# Altium PCB PCB4.PcbDoc (part 4 of 4)
Units mm, origin at the board's own origin, x right, y up, seen from the top; angles counter-clockwise.
Board outline 297 x 150 mm, 2 copper layers (Top Layer, Bottom Layer); 237 components, 147 nets, 681 pads, 111 vias.
Unrouted connection lines stored in the file: 7.
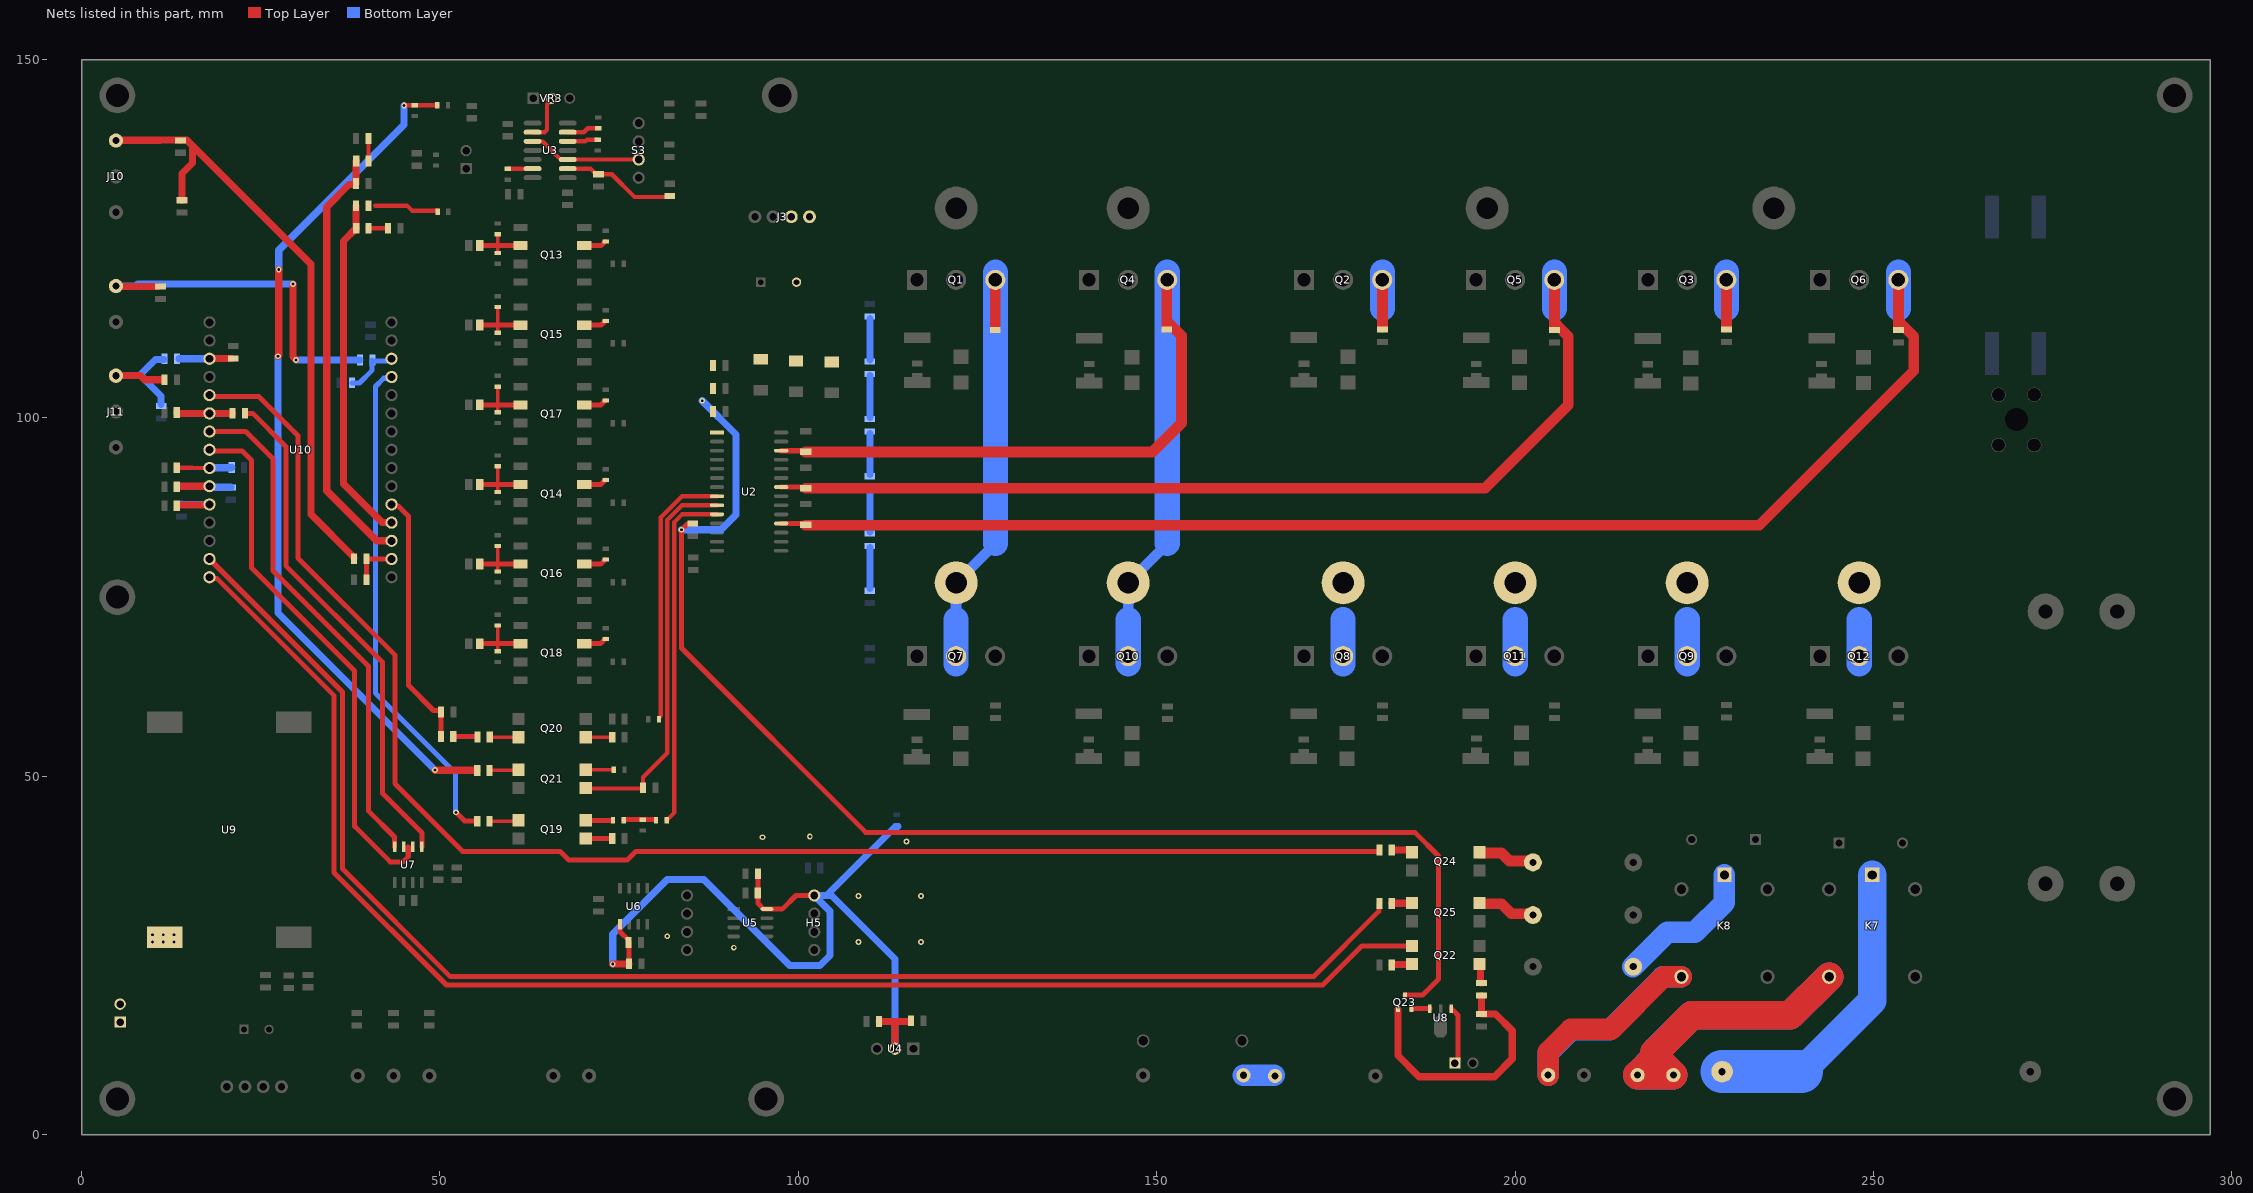
[diagram p3: the nets of this part, all layers, seen from the top]

## Via types
v1: diameter 0.8, hole 0.4, Top Layer to Bottom Layer, 111 vias

## Nets (pads, with @x,y where several pads share a name; then routed paths per layer and width w, separated by ;. In a path a pad name is that pad's centre, name@x,y a point inside that pad or via, vN(x,y) a via of type N, cw(c..) or ccw(c..) an arc to the next point about the centre after c; other vN are vias at no path point) (continued)
NetJ6_1: J6.1 U8.1 | length 8.2
  Top Layer w0.7: U8.1@191.1,17.6 191.2,17.5 191.2,17.35 191.35,17.35 192,16.7 192,10.4 J6.1@191.6,10
NetJ7_1: J7.1 J7.2 K7.3 | length 83.4
  Top Layer w4: 219.449,10.301 219.449,10.699 ; K7.3@243.8,22.05 238.4,16.65 224.627,16.65 219.449,11.472 219.449,10.951 ; 219.449,10.699 219.449,10.951 ; 219.449,10.699 J7.1@217.075,8.325 J7.2@222.075,8.325 219.449,10.951
  Bottom Layer w4: K7.3@243.8,22.05 238.4,16.65 224.625,16.65 219.575,11.6 219.575,10.825 ; 219.575,10.825 J7.1@217.075,8.325 J7.2@222.075,8.325 219.575,10.825
NetJ8_1: J8.1 K8.3 | length 52.3
  Top Layer w3: J8.1@204.6,8.325 204.6,11.55 207.788,14.738 213.388,14.738 220.7,22.05 K8.3@223.2,22.05
  Bottom Layer w3: J8.1@204.6,8.325 204.6,11.425 207.825,14.65 213.225,14.65 220.625,22.05 K8.3@223.2,22.05
NetJ10_1: J10.1 R105.1 R107.2 R113.2 | length 86.2
  Top Layer w1: J10.1@4.8,138.7 4.85,138.75 10.927,138.75 10.942,138.765 13.768,138.765 R107.2@13.8,138.732 13.816,138.732 13.848,138.765 14.685,138.765 15.468,137.982 ; R105.1@14,130.375 14,134.107 15.468,135.575 15.468,137.982 ; R113.2@38.018,80.375 38.018,80.55 32,86.568 32,121.45 15.468,137.982
NetJ11_1: J11.1 R106.1 R108.2 R114.2 | length 19.8
  Top Layer w1: J11.1@4.8,105.9 4.825,105.925 8.225,105.925 8.825,105.325 R108.2@11.25,105.325
  Bottom Layer w1: J11.1@4.8,105.9 4.825,105.925 8.075,105.925 ; R106.1@11.099,101.9 11.099,103.076 8.25,105.925 8.075,105.925 ; R114.2@11.518,108.175 11.518,108.145 10.295,108.145 8.075,105.925
NetJ13_1: J13.1 R112.2 R115.2 | length 50.5
  Top Layer w1: J13.1@4.8,118.4 4.859,118.341 R112.2@10.75,118.341 ; v1(29.5,118.7) 29.5,108.5 v1(29.9,108.1)
  Bottom Layer w1: J13.1@4.8,118.4 7.5,118.4 7.8,118.7 v1(29.5,118.7) ; v1(29.9,108.1) R115.2@38.843,108.1
NetJ14_1: J14.1 J14.2 U9.1
  other v1: 9.9,26.9 11.4,26.9 12.9,26.9 9.9,27.9 11.4,27.9 12.9,27.9
NetK7_1: K7.1 R96.1 | length 42.6
  Bottom Layer w4: 239.925,8.8 249.8,18.675 K7.1@249.8,36.25
  Bottom Layer w6: R96.1@228.875,8.8 239.925,8.8
NetK8_1: K8.1 R99.2 | length 20.4
  Bottom Layer w3: R99.2@216.4,23.45 221.2,28.25 225.075,28.25 229.2,32.375 K8.1@229.2,36.25
NetQ13_2: Q13.2 R59.1 R62.2 R68.2 | length 8.3
  Top Layer w0.5: R68.2@58.05,123.007 58.05,124.062 R59.1@58.05,125.625
  Top Layer w0.7: R62.2@55.525,124.077 55.54,124.062 58.05,124.062 61.21,124.062 Q13.2@61.225,124.047
NetQ13_7: Q13.7 R65.1 | length 3.2
  Top Layer w0.7: Q13.7@70.125,124.047 72.495,124.047 73.075,124.627 R65.1@73.125,124.627
NetQ14_2: Q14.2 R60.1 R63.2 R69.2 | length 9.3
  Top Layer w0.5: R69.2@58.05,89.68 58.05,90.726 R60.1@58.05,93.26
  Top Layer w0.7: R63.2@55.525,90.732 55.531,90.726 58.05,90.726 61.219,90.726 Q14.2@61.225,90.72
NetQ14_7: Q14.7 R66.1 | length 3.3
  Top Layer w0.7: Q14.7@70.125,90.72 72.438,90.72 73.075,91.357 R66.1@73.125,91.357
NetQ15_2: Q15.2 R61.1 R64.2 R70.2 | length 9.3
  Top Layer w0.5: R70.2@58.05,111.898 58.05,112.95 R61.1@58.05,115.478
  Top Layer w0.7: R64.2@55.525,112.962 55.537,112.95 58.05,112.95 61.213,112.95 Q15.2@61.225,112.938
NetQ15_7: Q15.7 R67.1 | length 3.2
  Top Layer w0.7: Q15.7@70.125,112.938 72.476,112.938 73.075,113.537 R67.1@73.125,113.537
NetQ16_2: Q16.2 R71.1 R74.2 R80.2 | length 9.3
  Top Layer w0.5: R80.2@58.05,78.571 58.05,79.614 R71.1@58.05,82.151
  Top Layer w0.7: R74.2@55.525,79.617 55.528,79.614 58.05,79.614 61.222,79.614 Q16.2@61.225,79.611
NetQ16_7: Q16.7 R77.1 | length 3.3
  Top Layer w0.7: Q16.7@70.125,79.611 72.419,79.611 73.075,80.267 R77.1@73.125,80.267
NetQ17_2: Q17.2 R72.1 R75.2 R81.2 | length 9.3
  Top Layer w0.5: R81.2@58.05,100.789 58.05,101.838 R72.1@58.05,104.369
  Top Layer w0.7: R75.2@55.525,101.847 55.534,101.838 58.05,101.838 61.216,101.838 Q17.2@61.225,101.829
NetQ17_7: Q17.7 R78.1 | length 3.3
  Top Layer w0.7: Q17.7@70.125,101.829 72.457,101.829 73.075,102.447 R78.1@73.125,102.447
NetQ18_2: Q18.2 R73.1 R76.2 R82.2 | length 9.3
  Top Layer w0.5: R82.2@58.05,67.462 58.05,68.502 R73.1@58.05,71.042
  Top Layer w0.7: R76.2@55.525,68.502 58.05,68.502 Q18.2@61.225,68.502
NetQ18_7: Q18.7 R79.1 | length 3.3
  Top Layer w0.7: Q18.7@70.125,68.502 72.4,68.502 73.075,69.177 R79.1@73.125,69.177
NetQ19_1: Q19.1 R85.2 | length 4.1
  Top Layer w0.5: R85.2@56.932,43.725 60.815,43.725 Q19.1@60.96,43.87
NetQ19_3: Q19.3 R89.2 | length 3.7
  Top Layer w0.7: Q19.3@70.34,41.33 R89.2@74.034,41.33
NetQ19_4: Q19.4 R87.1 | length 3.6
  Top Layer w0.7: Q19.4@70.34,43.87 R87.1@73.9,43.87
NetQ20_1: Q20.1 R84.1 | length 3.7
  Top Layer w0.5: Q20.1@70.34,55.455 R84.1@74.034,55.455
NetQ20_4: Q20.4 R86.1 | length 4
  Top Layer w0.5: R86.1@56.95,55.475 60.94,55.475 Q20.4@60.96,55.455
NetQ21_1: Q21.1 R90.2 | length 4.1
  Top Layer w0.5: R90.2@56.882,50.825 60.865,50.825 Q21.1@60.96,50.92
NetQ21_3: Q21.3 R92.2 U2.9 | length 54.6
  Top Layer w0.6: Q21.3@70.34,48.38 70.42,48.3 78.218,48.3 R92.2@78.318,48.4 78.318,49.868 81.713,53.262 81.713,85.76 83.772,87.82 U2.9@88.647,87.82
NetQ21_4: Q21.4 R91.1 | length 3.9
  Top Layer w0.5: Q21.4@70.34,50.92 74.23,50.92 R91.1@74.25,50.9
NetQ22_1: Q22.1 U10.30 | length 208.1
  Top Layer w0.7: U10.30@17.85,77.78 18.041,77.589 18.911,77.589 35.2,61.3 35.2,36.6 50.9,20.9 173.166,20.9 178.611,26.345 Q22.1@185.635,26.345
NetQ22_2: Q22.2 R94.2 | length 3
  Top Layer w1: R94.2@182.857,23.675 182.922,23.74 185.695,23.74 Q22.2@185.76,23.805
NetQ22_3: Q22.3 R93.1 | length 2.8
  Top Layer w1: Q22.3@195.015,23.805 195.157,23.663 195.157,21.25 195.233,21.175 R93.1@195.3,21.175
NetQ23_1: Q23.1 R93.2 R95.2 | length 36.4
  Top Layer w1: Q23.1@183.647,17.509 183.647,11.053 186.6,8.1 197.1,8.1 199.6,10.6 199.6,14.5 197.243,16.857 R95.2@195.3,16.857 R93.2@195.3,19.443
NetQ23_2: Q23.2 U8.3 | length 2.6
  Top Layer w0.7: Q23.2@185.552,17.509 185.643,17.6 U8.3@188.1,17.6
NetQ24_1: Q24.1 R100.2 | length 1.9
  Top Layer w1: 183.3,39.725 183.315,39.71 185.186,39.71 Q24.1@185.201,39.696
NetQ24_4: Q24.4 R97.1 | length 8.1
  Top Layer w1.5: Q24.4@195.015,39.42 195.015,39.405 195.105,39.315 198.105,39.315 199.229,38.191 202.284,38.191 R97.1@202.475,38
NetQ25_1: Q25.1 R101.2 | length 2.9
  Top Layer w1: R101.2@182.782,32.275 182.805,32.297 185.613,32.297 Q25.1@185.635,32.32
NetQ25_4: Q25.4 R98.1 | length 8.2
  Top Layer w1.5: Q25.4@195.015,32.32 195.015,32.305 195.105,32.215 198.105,32.215 199.479,30.841 202.284,30.841 R98.1@202.475,30.65
NetR32_1: R32.1 R83.1 R87.2 | length 4.2
  Top Layer w0.7: R87.2@75.641,43.87 75.641,43.9 75.691,43.95 R83.1@78.3,43.95 79.8,43.95
NetR32_2: R32.2 U2.10 | length 48.5
  Top Layer w0.6: R32.2@81.65,43.9 81.65,44.05 81.8,44.05 82.7,44.95 82.7,85.475 83.775,86.55 U2.10@88.647,86.55
NetR33_2: R33.2 U2.8 | length 37.3
  Top Layer w0.6: R33.2@80.55,58.05 80.55,58.2 80.8,58.45 80.8,86.133 83.757,89.09 U2.8@88.647,89.09
NetR35_1: R35.1 R37.2 U3.9 | length 15.9
  Top Layer w0.6: U3.9@67.825,134.785 70.99,134.785 71.775,134 R35.1@72.1,134 73.963,134 77.145,130.818 81.925,130.818 R37.2@82.05,130.943
NetR38_2: R38.2 R109.2 | length 9.2
  Top Layer w0.6: 40.953,129.625 45.4,129.625 46.1,128.925 49.675,128.925 R38.2@49.675,128.775
NetR39_2: R39.2 R41.2 R90.1 | length 119.6
  Top Layer w0.6: v1(45,143.6) 45.025,143.625 R39.2@49.625,143.625 ; v1(49.3,50.9) v1@49.337,50.863 ; R90.1@55.163,50.863 R90.1@55.2,50.825
  Top Layer w1: v1(27.411,108.613) 27.5,108.702 v1(27.5,120.7) ; v1@49.337,50.863 R90.1@55.163,50.863
  Bottom Layer w1: v1(27.411,108.613) 27.4,108.602 27.4,72.8 v1(49.3,50.9) ; v1(27.5,120.7) 27.5,123.4 45,140.9 v1(45,143.6)
NetR42_1: R42.1 U3.6 | length 3.5
  Top Layer w0.6: R42.1@59.45,134.75 59.6,134.75 59.635,134.785 U3.6@62.925,134.785
NetR43_1: R43.1 U3.13 | length 4.5
  Top Layer w0.6: U3.13@67.825,139.865 70.059,139.865 70.619,140.425 R43.1@72.075,140.425
NetR46_1: R46.1 U3.12 | length 4.3
  Top Layer w0.6: U3.12@67.825,138.595 70.27,138.595 70.5,138.825 R46.1@72.025,138.825
NetR47_2: R47.2 R49.2 | length 4.3
  Bottom Layer w3: R49.2@162.1,8.3 R47.2@166.4,8.3
NetR48_1: R48.1 R50.1 | length 5.7
  Bottom Layer w1: R50.1@109.975,108.125 R48.1@109.975,113.875
NetR50_2: R50.2 R51.2 | length 5.8
  Bottom Layer w1: R51.2@109.975,100.1 R50.2@109.975,105.9
NetR51_1: R51.1 R53.1 | length 5.7
  Bottom Layer w1: R53.1@109.975,92.125 R51.1@109.975,97.8
NetR53_2: R53.2 R54.1 | length 5.7
  Bottom Layer w1: R54.1@109.975,84.125 R53.2@109.975,89.875
NetR54_2: R54.2 R55.1 | length 5.7
  Bottom Layer w1: R55.1@109.975,76.225 R54.2@109.975,81.9
NetR85_1: R85.1 U10.12 | length 70.4
  Top Layer w0.7: v1(52.225,44.975) 52.233,44.975 53.42,43.788 55.125,43.788 55.188,43.725 R85.1@55.2,43.725
  Bottom Layer w0.7: U10.12@43.25,105.72 43.071,105.541 42.141,105.541 41,104.4 41,61.6 52.175,50.425 52.175,45.025 v1(52.225,44.975)
NetR86_2: R86.2 R123.2 | length 3.4
  Top Layer w0.7: R123.2@51.857,55.575 55.143,55.575 55.218,55.5 R86.2@55.218,55.475
NetR100_1: R100.1 U10.20 | length 211.3
  Top Layer w0.7: U10.20@17.85,103.18 18.041,102.989 24.736,102.989 30.2,97.525 30.2,80.45 43.7,66.95 43.7,49 53.175,39.525 66.775,39.525 68,38.3 76.1,38.3 77.325,39.525 180.975,39.525 181.05,39.6 R100.1@181.05,39.725
NetR101_1: R101.1 U10.29 | length 206.6
  Top Layer w0.7: U10.29@17.85,80.32 36.4,61.77 36.4,37.1 51.437,22.063 171.863,22.063 180.975,31.175 180.975,32.2 R101.1@181.05,32.275
NetR109_1: R109.1 R110.2 U10.4 | length 48.5
  Top Layer w1: R109.1@38.3,129.6 38.309,129.591 38.309,126.484 R110.2@38.318,126.475 36.55,124.707 36.55,90.825 41.951,85.424 43.226,85.424 U10.4@43.25,85.4
NetR110_1: R110.1 R111.2 | length 2.9
  Top Layer w0.6: R110.1@39.912,126.463 42.755,126.463 R111.2@42.768,126.45
NetR113_1: R113.1 R116.2 U10.2 | length 6.5
  Top Layer w0.7: R116.2@39.75,77.425 R113.1@39.75,80.375 39.777,80.347 43.222,80.347 U10.2@43.25,80.32
NetR114_1: R114.1 R117.2 U10.18 | length 7.4
  Top Layer w1: U10.18@17.85,108.26 17.87,108.28 20.937,108.28 R117.2@20.95,108.293
  Bottom Layer w1: R114.1@13.575,108.255 17.845,108.255 U10.18@17.85,108.26
NetR115_1: R115.1 R118.2 U10.13 | length 8.5
  Bottom Layer w0.7: R118.2@37.707,104.9 37.735,104.872 38.772,104.872 40.5,106.6 40.5,108.025 R115.1@40.575,108.1 ; R115.1@40.625,107.975 U10.13@42.694,107.975 ; U10.13@42.694,107.975 U10.13@42.979,108.26 ; U10.13@42.694,107.975 U10.13@42.979,108.26 ; U10.13@42.979,108.26 U10.13@43.25,108.26 U10.13@42.979,108.26
NetR119_1: R119.1 R126.2 U10.24 | length 7.6
  Top Layer w0.6: R126.2@13.407,93.05 15.417,93.05 15.457,93.01 17.84,93.01 U10.24@17.85,93.02
  Bottom Layer w1: U10.24@17.85,93.02 17.89,93.06 20.91,93.06 R119.1@20.95,93.1
NetR120_1: R120.1 R127.2 U10.26 | length 8.5
  Top Layer w1: R127.2@13.407,87.75 13.407,87.77 13.482,87.845 17.755,87.845 U10.26@17.85,87.94
  Bottom Layer w1: R120.1@13.925,87.975 13.96,87.94 U10.26@17.85,87.94
NetR121_1: R121.1 R125.2 U10.3 | length 60.1
  Top Layer w1: R121.1@38.3,132.676 38.175,132.551 37.326,132.551 34.2,129.425 34.2,89.85 41.19,82.86 U10.3@43.25,82.86 ; R121.1@38.3,132.725 38.309,132.734 38.309,135.841 R125.2@38.318,135.85
NetR122_1: R122.1 R130.2 U10.25 | length 7.5
  Top Layer w1: R130.2@13.432,90.4 13.497,90.465 17.527,90.465 17.542,90.48 U10.25@17.85,90.48
  Bottom Layer w1: U10.25@17.85,90.48 17.984,90.346 18.554,90.346 18.575,90.325 R122.1@20.825,90.325
NetR123_1: R123.1 R131.2 U10.5 | length 36.2
  Top Layer w0.7: U10.5@43.25,87.94 43.441,87.749 44.151,87.749 45.6,86.3 45.6,62.7 49.104,59.196 50.068,59.196 50.143,59.121 R131.2@50.143,58.975 50.134,58.966 50.134,55.584 R123.1@50.125,55.575
NetR124_1: R124.1 R129.2 U10.21 | length 7.9
  Top Layer w1: R129.2@13.282,100.775 13.357,100.7 13.357,100.64 U10.21@17.85,100.64 17.855,100.645 21.045,100.645 R124.1@21.05,100.65
NetR124_2: R124.2 U7.1 | length 71.3
  Top Layer w0.7: R124.2@22.782,100.65 23.875,100.65 28.5,96.025 28.5,79.4 41.975,65.925 41.975,47.625 47.48,42.12 U7.1@47.48,40.175
NetR125_1: R125.1 R128.2 | length 3.1
  Top Layer w0.6: R128.2@40.032,138.975 40.041,138.966 40.041,135.859 R125.1@40.05,135.85
NetS3_3: S3.3 U3.3 U3.10 | length 15.9
  Top Layer w0.6: U3.3@62.925,138.595 62.944,138.576 64.328,138.576 66.83,136.074 67.806,136.074 U3.10@67.825,136.055 S3.3@77.725,136.055
NetU3_2: U3.2 VR3.2 | length 6.8
  Top Layer w0.6: U3.2@62.925,139.865 64.574,139.865 64.925,140.216 64.925,143.774 65.56,144.409 VR3.2@65.56,144.6
NetU7_2: U7.2 U7.3 U10.23 | length 74.7
  Top Layer w0.7: U10.23@17.85,95.56 18.01,95.4 22.403,95.4 23.74,94.063 23.74,79.06 38.1,64.7 38.1,43.025 43.05,38.075 44.85,38.075 45.575,38.8 45.575,40.175
NetU7_4: U7.4 U10.22 | length 71.6
  Top Layer w0.7: U10.22@17.85,98.1 22.9,98.1 26.7,94.3 26.7,78.7 40,65.4 40,45.2 43.67,41.53 U7.4@43.67,40.175
PHASE_A: C3.2 HS3.1 Q1.3 Q4.3 Q7.2 Q10.2 R4.2 R10.2 U2.26 | length 204.7
  Top Layer w0.7: 153.25,99.1 153.46,99.31
  Top Layer w0.8: U2.26@97.603,95.44 100.47,95.44 100.65,95.26 C3.2@101,95.26
  Top Layer w1.5: C3.2@101,95.26 149.41,95.26 153.25,99.1 ; R4.2@127.478,112.675 Q1.3@127.478,119.272 ; 151.39,113.54 151.411,113.519 ; R10.2@151.411,112.7 151.411,113.519 ; Q4.3@151.411,119.224 151.411,113.519 ; 153.46,99.31 153.46,111.47 151.411,113.519
  Bottom Layer w1.5: 122.009,71.886 122.009,76.991 HS3.1@122.018,77 127.478,82.46 ; Q10.2@146,66.773 146.009,66.782 146.009,76.991 HS3.1@146.018,77 151.46,82.442
  Bottom Layer w3.5: Q7.2@122.009,65.7 122.009,71.886 ; 127.478,82.46 Q1.3@127.478,119.272 Q1.3@127.478,120.325 ; Q10.2@146.018,65.709 146.018,71.895 ; 151.46,82.46 Q4.3@151.46,119.272 Q4.3@151.46,120.325
PHASE_B: C4.2 HS4.1 Q2.3 Q5.3 Q8.2 Q11.2 R5.2 R11.2 U2.22 | length 162.2
  Top Layer w0.7: U2.22@97.603,90.36 100.39,90.36 100.575,90.175 100.925,90.175 C4.2@101.025,90.075
  Top Layer w1.5: C4.2@101.025,90.18 195.78,90.18 207.423,101.823 207.423,111.379 206.022,112.779 205.826,112.976 ; R5.2@181.478,112.65 Q2.3@181.478,119.248 ; 205.5,112.7 Q5.3@205.5,119.232
  Bottom Layer w3.5: Q8.2@176.009,65.7 176.009,71.886 ; 181.469,115.275 Q2.3@181.469,120.35 ; Q11.2@200.009,65.7 200.009,71.886 ; 205.469,115.275 Q5.3@205.469,120.35
PHASE_C: C6.2 HS5.1 Q3.3 Q6.3 Q9.2 Q12.2 R6.2 R12.2 U2.18 | length 210.1
  Top Layer w0.7: U2.18@97.603,85.28 100.42,85.28 100.65,85.05 C6.2@101,85.05 ; 233.7,85.05 234.05,85.05
  Top Layer w1.5: C6.2@101,85.05 233.7,85.05 ; R6.2@229.478,112.725 Q3.3@229.478,119.322 ; 234.05,85.05 255.6,106.6 255.6,111.379 253.702,113.277 ; 253.5,112.7 Q6.3@253.5,119.232
  Bottom Layer w3.5: Q9.2@224.009,65.7 224.009,71.886 ; 229.469,115.275 Q3.3@229.469,120.35 ; Q12.2@248.009,65.7 248.009,71.886 ; 253.469,115.275 Q6.3@253.469,120.35
VCC_15V: C11.2 C12.1 C13.2 C14.1 D13.2 D14.2 D15.2 J3.1 J3.2 Q23.3 R25.1 U2.1 | length 185.2
  Top Layer w0.7: R25.1@85.25,85.28 85.175,85.205 84.505,85.205 v1(83.7,84.4) 83.7,67.9 109.4,42.2 185.5,42.2 185.512,42.188 186.012,42.188 189.3,38.9 189.3,21.7 187.091,19.491 Q23.3@184.6,19.491
  Bottom Layer w1: v1(83.7,84.4) 89.2,84.4 91.3,86.5 91.3,97.7 v1(86.6,102.4)
VS_GND: C20.2 C21.2 C24.2 C25.2 C26.2 C27.2 H5.1 R88.2 U4.2 U5.8 U6.5 | length 123.5
  Top Layer w0.7: U6.5@75.12,29.375 75.1,29.355 75.1,28.368 76.318,27.15 C24.2@76.318,26.825 76.343,26.8 C26.2@76.343,23.875 ; C27.2@94.357,36.4 94.357,32.28 95.158,31.48 U5.8@95.618,31.48 97.75,31.48 99.66,33.39 H5.1@102.225,33.39
  Top Layer w1: v1(74.1,23.8) 76.293,23.8 76.343,23.85 C26.2@76.343,23.875 ; C21.2@111.257,15.8 113.463,15.8 ; U4.2@113.5,12 113.5,15.763 113.463,15.8 ; C20.2@115.668,15.8 113.463,15.8
  Bottom Layer w1: v1(74.1,23.8) 74.1,28 81.7,35.6 86.8,35.6 98.8,23.6 103,23.6 104.4,25 104.4,31.192 102.225,33.367 H5.1@102.225,33.39 103.94,33.39 ; U4.2@113.5,12 113.5,24.5 104.61,33.39 103.94,33.39 ; R88.2@113.9,43 113.55,43 103.94,33.39
  other v1: 91,26.1 108.4,26.9 117.1,26.9 81.7,27.7 108.4,33.3 117.1,33.3 115.1,40.9 95,41.5 101.6,41.6
pads on no net: K7.4 K8.4 Q13.1 Q13.4 Q14.1 Q14.4 Q15.1 Q15.4 Q16.1 Q16.4 Q17.1 Q17.4 Q18.1 Q18.4 U2.21 U2.25 U3.14 U10.1 U10.16 U10.19 U10.27 U10.28

## Polygon pours and split planes (outlines as drawn)
no net on Bottom Solder "Bottom Solder-No Net" (hatched 45Degree grid 2 track 0.5): 264.175,27.4 275.325,27.373 275.325,107.6 264.175,107.6 264.175,61.15 113.45,61.15 113.45,45.65 264.175,45.65
no net on Bottom Solder "Bottom Solder-No Net" (hatched 45Degree grid 2 track 0.5): 257.325,5.225 277.45,5.225 292.15,19.925 292.325,128.05 279.4,140.5 113,140.5 113,125 260.5,125 270.875,125 282,113.875 282,19.05 274.925,11.975 257.325,11.975
PHASE_C on Bottom Solder "NONET_L-01_P-001" (hatched 45Degree grid 2 track 0.5): 220.05,114.3 255.1,114.3 255.325,114.525 255.325,72.275 220.1,72.275 219.525,72.85 219.525,114.15 219.525,114.3
PHASE_B on Bottom Solder "Bottom Solder-PHASE_B" (hatched 45Degree grid 2 track 0.5): 172.05,114.3 207.1,114.3 207.325,114.525 207.325,72.275 172.1,72.275 171.525,72.85 171.525,114.15 171.525,114.3
no net on Bottom Solder "NONET_L-01_P-001" (hatched 45Degree grid 2 track 0.5): 118.1,114.225 153.15,114.225 153.375,114.45 153.375,72.2 118.15,72.2 117.575,72.775 117.575,114.075 117.575,114.225
COM on Top Layer "15V_GND" (solid, pour order 66): 92.875,82.8 94.085,84.01 96.29,84.01 96.3,84 95.5,83.2 95.5,80.4 92.8,80.4 90.4,82.8 89.8,82.8
+5V_GATE_DRV on Top Layer (solid, pour order 65): 183.708,2.403 184,2.398 184,3.002 179.5,7.502 103.9,7.502 95.396,16.006 75.1,16.006 75.1,8.2 72.302,5.402 35.6,5.402 35.6,17.5 38.3,20.2 38.3,21 24.9,21 24.4,20.5 24.4,3.821 25.821,2.4 35.6,2.4 35.6,2.402 183.707,2.402
15V_GND on Top Layer (solid, remove dead copper, pour order 64): 72.4,5.377 72.5,5.277 72.5,2.377 196.6,2.377 199.9,5.677 199.9,20.477 191,20.477 187.9,23.577 188,23.677 188,43.277 123.6,43.277 123.3,43.577 123.3,8.177 122.8,7.677 104.6,7.677 94.3,17.977 94.3,42.1 107.2,42.1 94.3,55 94.3,99.877 104.2,99.877 107.4,103.077 107.4,146.177 105.085,148.492 90.2,148.6 90.2,138.777 85.5,134.077 85.5,130.577 83.3,128.377 67.2,128.377 67.2,23.677 75.2,15.677 75,15.477 75,7.977
VS_GND on Top Layer "15V_GND" (solid, remove dead copper, pour order 60): 67.1,39.4 89.192,39.4 93.076,43.284 122.676,43.284 122.676,4.684 106.376,4.684 94.461,16.6 74.3,16.6 67.1,23.8
MCU_GND on Top Layer "15V_GND" (solid, remove dead copper, pour order 55): 35.6,148.7 8.6,148.7 1.4,141.5 1.4,30.9 36.2,30.9 42.3,24.8 42.3,21.8 40.9,21.8 36.5,17.4 36.5,6.4 36.4,6.3 71.8,6.3 74.1,8.6 74.1,10.9 74,10.9 64.466,20.434 64.466,128.1 51.2,128.1 39.9,116.8 38.9,116.8 38.3,116.2 38.3,91.4 42.5,87.2 44.7,87.2 45.5,86.4 45.5,82.3 44.8,81.6 41.4,81.6 41.4,82.65 34.2,89.85 34.2,129.425 35.763,130.988 35.6,131.151
MCU_GND on Top Layer "15V_GND" (solid, remove dead copper, pour order 54): 36,148.7 36,131.9 33.7,129.6 33.7,89.7 41.4,82 44.5,82 45.1,82.6 45.1,86.2 44.4,86.9 42.2,86.9 38.051,91.049 37.948,116.548 38.6,117.2 39.8,117.2 51.1,128.5 82.9,128.5 85.2,130.8 85.2,134.2 90,139 90,147.6 90,148.7
15V_GND on Top Layer "Top Layer-15V_GND" (solid, pour order 36): 23.804,21 24.604,21.8 44.466,21.59 35.556,30.4 17.9,30.4 17.9,16.196 11.404,9.7 1.7,9.7 1.7,8.3 7.5,2.5 22.504,2.5 23.804,3.8
+5V_MCU on Top Layer "15V_GND" (solid, pour order 31): 52.6,33.9 52.6,35.6 49.937,35.6 49.913,35.575 51.549,33.938 51.712,33.938
+5V_MCU on Top Layer "15V_GND" (solid, pour order 30): 37.8,16.94 37.8,18.7 41.1,22 41.1,25.7 41.4,25.7 44.6,22.5 43.46,21.36 43.46,17.825 39.618,17.825
+5V_MCU on Top Layer "15V_GND" (solid, pour order 28): 43.9,25 51.3,17.6 51.3,17.5 48,17.5 47.8,17.3 47.1,18 44.1,18
15V_GND on Top Layer "15V_GND" (solid, pour order 27): 68.7,120.3 76.8,120.3 77.3,119.8 77.3,119 76.8,118.5 69,118.5
+5V_VDD on Top Layer "15V_GND" (solid, pour order 26): 79.2,27.9 79.2,26.6 80.9,24.9 80.9,23.2 78.2,23.2 78.05,23.35 78.05,26.987
+5V_MCU on Top Layer "15V_GND" (solid, pour order 25): 70,147.1 72.1,147.1 72.2,147 72.6,146.6 72.6,145 72.1,145
+5V_MCU on Top Layer "15V_GND" (solid, pour order 24): 72.375,146.825 76.9,142.3 72.45,142.3 72.075,141.925
MCU_GND on Top Layer "15V_GND" (solid, pour order 23): 59.5,59.3 63.1,59.3 63.6,58.8 63.5,58.7 63.5,55.47 60.477,58.492
MCU_GND on Top Layer "15V_GND" (solid, pour order 22): 61.407,121.507 62.001,122.1 64.5,122.1 64.5,41.8 63.2,40.5 61.3,40.5 60.7,41.1 62.6,43 62.6,119.9
15V_GND on Top Layer "15V_GND" (solid, pour order 21): 69.875,118.971 68.2,120.8 67.2,120.8 67.2,40.9 68.7,39.4 68.7,117.31
+5V_GATE_DRV on Top Layer "15V_GND" (solid, pour order 11): 250.7,43.3 250.1,43.3 244.1,37.3 234.5,37.3 232.1,39.7 232.1,42.2 233.9,44 250.6,44
NetJ14_1 on Top Layer "15V_GND" (solid, pour order 6): 17.1,16.6 10.8,10.3 1.7,10.3 1.7,30.2 1.8,30.3 17.1,30.3
15V_GND on Top Layer "15V_GND" (solid, pour order 5): 97.4,134.7 97.4,116.7 95,114.3 87.5,114.3 87.5,134.6 88.9,136 96.1,136
VCC_15V on Top Layer "vcc_15v" (solid, pour order 1): 107.575,113.625 107.575,134.825 106.4,136 99.4,136 98.1,134.7 98.1,116.4 94.3,112.6 107.5,112.6
MCU_GND on Bottom Layer "MCU_GND" (solid, remove dead copper, pour order 53): 35.646,148.6 8.6,148.6 1.4,141.4 1.4,30.9 20.4,30.9 36.4,14.9 36.4,6.4 71.8,6.4 74,8.6 74,11.3 64.5,20.8 64.5,128.3 51.5,128.3 44.6,121.4 44.2,121.8 38.896,121.8 35.646,125.275
15V_GND on Bottom Layer "Bottom Layer-No Net" (solid, remove dead copper, pour order 52): 67.2,23.5 67.4,23.5 75.2,15.7 75,15.5 75,8 72.4,5.4 72.5,5.3 72.5,2.4 196.6,2.4 199.9,5.7 199.9,20.5 191,20.5 187.9,23.6 188,23.7 188,43.3 123.6,43.3 123.3,43.6 123.3,8.2 122.8,7.7 104.6,7.7 94.3,18 94.3,99.9 104.2,99.9 107.4,103.1 107.4,146.2 105.085,148.515 90.2,148.623 90.2,138.8 85.5,134.1 85.5,130.6 83.3,128.4 69.7,128.4 69.7,128.3 67.2,125.8
MCU_GND on Bottom Layer "MCU_GND" (solid, remove dead copper, pour order 50): 36,148.525 36,125.4 39.2,122.2 49.2,122.2 61.114,128.2 84.9,128.2 86.4,129.7 86.4,134.1 90.8,138.5 90.8,148.7
+5V_GATE_DRV on Bottom Layer "15V_GND" (solid, pour order 46): 71.025,2.375 73.75,5.1 172.1,5.1 169.375,2.375
NetJ14_1 on Bottom Layer "15V_GND" (solid, pour order 43): 17.1,16.6 10.8,10.3 1.4,10.3 1.4,30.35 17.1,30.35
15V_GND on Bottom Layer "Bottom Layer-15V_GND" (solid, pour order 41): 23.804,21 24.604,21.8 28.891,21.755 20.148,30.4 17.9,30.4 17.9,16.196 11.404,9.7 1.4,9.7 1.4,8.6 7.5,2.5 22.504,2.5 23.804,3.8
+5V_MCU on Bottom Layer "15V_GND" (solid, pour order 33): 1.3,101.3 1.3,60.6 8.6,53.3 13.6,53.3 13.6,88.8 8.5,93.9
VS_GND on Bottom Layer "15V_GND" (solid, pour order 32): 69.7,37.8 87.6,37.8 93.1,43.3 122.7,43.3 122.7,4.7 106.4,4.7 89.4,21.7 73,21.7 69.7,25
+5V_MCU on Bottom Layer "15V_GND" (solid, pour order 20): 43.402,120.402 39.4,116.4 39.4,115.9 40.69,115.9 43.25,113.34
+5V_MCU on Bottom Layer "15V_GND" (solid, pour order 19): 1.3,116.4 1.3,110.5 1.4,110.4 4.4,113.4 4.575,113.4
MCU_GND on Bottom Layer "15V_GND" (solid, pour order 18): 30,109.15 28.45,110.7 31.8,110.7
+5V_MCU on Bottom Layer "15V_GND" (solid, pour order 17): 60.5,126.1 60.5,130.6 62.8,130.6 62.8,125.1 62.6,124.9
+5V_GATE_DRV on Bottom Layer "Bottom Layer-+5V_GATE_DRV" (solid, pour order 16): 75,2.5 105.6,2.5 105.6,5.1 89.1,21.6 69.222,21.6 75,15.822
+5V_GATE_DRV on Bottom Layer "15V_GND" (solid, pour order 12): 25.8,2.4 24.4,3.8 24.4,20.5 24.9,21 29.1,21 35.3,14.8 35.3,2.4
VCC_15V on Bottom Layer "VCC_15V" (solid, pour order 9): 98,129.3 99,130.3 101.8,130.3 103.1,129 103.1,118.9 101.3,117.1 98.5,117.1 98,117.6

## Other copper
Top Layer:
  rectangle net NetU7_2: 44.9,39.488 46.3,40.8
  region net +48V: 112.05,124 117.301,124 117.301,123.99 122.018,119.272 126.746,124 141.272,124 146,119.272 150.728,124 171.272,124 176,119.272 180.728,124 195.272,124 200,119.272 204.728,124 219.272,124 224,119.272 228.728,124 243.272,124 248,119.272 252.728,124 261.275,124 270.275,124 280.45,113.825 280.45,14.05 288.925,14.05 294.1,19.225 294.1,129.084 291.105,132.08 281.1,141.475 261.415,141.475 261.415,141.54 261.35,141.475 261.275,141.475 261.275,141.45 112.05,141.5
  region net NetJ10_1: 15.468,137.982 15.468,135.575 15.643,135.4 18.1,135.4
  region net VS_GND: 113.5,14.1 112,15.6 112,15.9 114.9,15.9 115.1,15.7
  region net +5V_MCU: 59.525,138.275 59.388,138.275 58.375,137.262 60.475,137.262 60.475,137.325
  region net MCU_GND: 83.312,144.862 82.05,143.6 86.495,143.6 85.214,144.881 84.319,144.881
  region net +5V_GATE_DRV: 75.6,54.1 74.8,53.3 74.8,52.9 75.515,52.185 75.766,52.185
  region net MCU_GND: 6.15,99.175 8.5,96.825 8.5,80.6 10.55,78.55 11.55,79.55 11.55,102.175 10.95,102.775 3.4,102.775 2.525,101.9 2.525,100.05 3.4,99.175 4.6,99.175
  region net 15V_GND: 89.075,83.75 92.025,83.75 93.425,85.15 95.525,85.15 95.525,86.9 92.45,89.975 92.45,107.425 91.3,108.575 89.8,108.575 89.8,108.525 89.375,108.1 89.375,99.625 90.175,98.861 90.175,98.325 90.175,84.575 89.875,84.275 89.125,84.275
  region net VCC_15V: 89.6,98.2 88.6,99.2 88.6,108.775 89.125,109.3 91.825,109.3 94.1,107.025 105.725,107.025 107.575,108.875 107.575,113.625 88.2,113.625 85.7,111.125 85.7,99.675 87.65,97.725 89.6,97.725
  region net COM: 261.95,34.6 261.95,107.8 264.45,110.3 275,110.3 277.725,107.575 277.725,26 261.8,26
  region net NetJ7_1: 220.775,11.05 220.775,13.125 220.625,13.275 220.6,13.25 218.525,13.25 218.525,11.175 218.4,11.05
  region net NetD1_2: 115.761,107.47 115.211,108.02 115.211,111.345 117.761,111.345 117.936,111.17 117.861,111.095 117.861,110.42 117.886,110.42 120.061,108.245
  region net NetD4_2: 139.775,107.393 139.225,107.943 139.225,111.268 141.775,111.268 141.95,111.093 141.875,111.018 141.875,110.343 141.9,110.343 144.075,108.168
  region net NetD2_2: 169.733,107.435 169.183,107.985 169.183,111.31 171.733,111.31 171.908,111.135 171.833,111.06 171.833,110.385 171.858,110.385 174.033,108.21
  region net NetD5_2: 193.733,107.418 193.183,107.968 193.183,111.293 195.733,111.293 195.908,111.118 195.833,111.043 195.833,110.368 195.858,110.368 198.033,108.193
  region net NetD3_2: 217.675,107.368 217.125,107.918 217.125,111.243 219.675,111.243 219.85,111.068 219.775,110.993 219.775,110.318 219.8,110.318 221.975,108.143
  region net NetD6_2: 241.925,107.393 241.375,107.943 241.375,111.268 243.925,111.268 244.1,111.093 244.025,111.018 244.025,110.343 244.05,110.343 246.225,108.168
  region net NetD12_2: 241.675,54.993 241.125,55.543 241.125,58.868 243.675,58.868 243.85,58.693 243.775,58.618 243.775,57.943 243.8,57.943 245.975,55.768
  region net NetD9_2: 217.675,54.993 217.125,55.543 217.125,58.868 219.675,58.868 219.85,58.693 219.775,58.618 219.775,57.943 219.8,57.943 221.975,55.768
  region net NetD11_2: 193.775,55.168 193.225,55.718 193.225,59.043 195.775,59.043 195.95,58.868 195.875,58.793 195.875,58.118 195.9,58.118 198.075,55.943
  region net NetD8_2: 169.675,54.993 169.125,55.543 169.125,58.868 171.675,58.868 171.85,58.693 171.775,58.618 171.775,57.943 171.8,57.943 173.975,55.768
  region net NetD10_2: 139.675,54.993 139.125,55.543 139.125,58.868 141.675,58.868 141.85,58.693 141.775,58.618 141.775,57.943 141.8,57.943 143.975,55.768
  region net NetD7_2: 115.725,54.975 115.175,55.525 115.175,58.85 117.725,58.85 117.9,58.675 117.825,58.6 117.825,57.925 117.85,57.925 120.025,55.75
Bottom Layer:
  rectangle net +5V_MCU: 8.6,54.6 12.8,59.9
  region net PHASE_C: 251.895,70.75 256.282,70.75 256.282,116.432 253.442,119.272 249.094,114.925 233.808,114.925 229.46,119.272 225.213,115.025 218.457,115.025 218.457,72.316 223.991,66.782 227.96,70.75 244.023,70.75 247.959,66.814
  region net NetC29_1: 99.2,37.2 97.7,38.7 97.7,35.9 97.6,35.8
  region net +5V_MCU: 58.2,140.1 58.2,134.5 57.8,134.1 54.9,137 54.9,137.3
  region net NetC29_1: 109.6,72.575 108.375,71.35 108.375,70.525 109.725,69.175 110.075,69.525 110.075,72.575
  region net +48V: 122.018,119.272 126.746,124 141.272,124 146,119.272 150.728,124 171.272,124 176,119.272 180.728,124 195.272,124 200,119.272 204.728,124 219.272,124 224,119.272 228.728,124 243.272,124 248,119.272 252.728,124 261.171,124 270.2,124 280.35,113.85 280.35,14.075 289.025,14.075 294.1,19.15 294.1,129.009 291.005,132.105 281,141.5 112.05,141.5 112.05,124 117.29,124
  region net COM: 261.95,61.675 261.95,107.775 264.45,110.275 275,110.275 277.725,107.55 277.725,25.975 261.8,25.975 261.8,53.075
  region net NetK7_1: 251.8,20.15 251.8,16.525 242.05,6.7 239.925,8.15 239.925,8.8
  region net COM: 111.975,44.545 263.428,44.545 263.428,62.045 258.187,62.045 253.46,66.773 248.732,62.045 234.206,62.045 229.478,66.773 224.75,62.045 210.187,62.045 205.46,66.773 200.732,62.045 186.188,62.045 181.46,66.773 176.732,62.045 156.206,62.045 151.478,66.773 146.75,62.045 132.206,62.045 127.478,66.773 122.75,62.045 111.975,62.045
  region net PHASE_B: 203.895,70.75 208.282,70.75 208.282,116.432 205.442,119.272 201.095,114.925 185.808,114.925 181.46,119.272 177.213,115.025 170.457,115.025 170.457,72.316 175.991,66.782 179.96,70.75 196.023,70.75 199.959,66.814
  region net PHASE_A: 149.913,70.75 154.3,70.75 154.3,116.432 151.46,119.272 147.112,114.925 131.825,114.925 127.478,119.272 123.231,115.025 116.475,115.025 116.475,72.316 122.009,66.782 125.978,70.75 142.041,70.75 145.977,66.814

## Silkscreen, mask and mechanical layers (free items; w line width, h text height)
Top Overlay:
  region: 291.97,104.604 291.951,104.604 291.951,104.622 291.97,104.622
  region: 281.831,105.216 281.849,105.216 281.849,105.198 281.831,105.198
  region: 280.085,103.508 280.066,103.508 280.066,103.527 280.085,103.527
  region: 282.128,107.148 282.128,107.166 282.165,107.166 282.165,107.111 282.146,107.111 282.146,107.092 282.128,107.092 282.128,107.073 282.109,107.073 282.109,107.111 282.128,107.111 282.128,107.129
  lines w0.3: 86.4,27.3 89.2,24.5 89.2,12.9 88.5,12.2 ; 98.2,12.1 97.5,12.8 97.5,24.4 100.3,27.2
  lines w0.5: 108.9,27.7 143.2,27.7 143.2,37.3 108.9,37.3 108.9,27.7
  lines w1: 65.6,25.1 65.6,130.8
  text "-" at 92.1,132.3 h2
  text "15V" at 95.4,132.3 h1.5
  text "+" at 102.1,132.267 h2
  text "TEMP" at 44.7,131.6 h1.5
  text "1kW BLDC Motor Controller" at 105.9,27.8 h5
  text "Dinu K Reji / Joe Abel Vincent / Blesson Tomy / Vinayak Prasad" at 147.3,22.2 h5
  text "+15V" at 10.3,19.7 h1.52 r270
  text "VCC / TXD / RXD / SDA" at 84.1,13.1 h1.52
  text "GND / PA3 / UPDI / SCL" at 98,13.1 h1.52
  text "+" at 64.654,12.6 h1.52
  text "-" at 70.254,12.592 h1.52
  text "+" at 27.354,2.1 h1.52
  text "-" at 19.654,2.092 h1.52
Bottom Solder:
  region: 112,141.5 112,124.001 112.001,124
  lines w3: 122,65.772 122,66.272 122,67.272 122,67.773 ; 122.018,118.272 122.018,118.772 122.018,119.772 122.018,120.273 ; 127.46,65.772 127.46,66.272 127.46,67.272 127.46,67.773 ; 127.478,118.272 127.478,118.772 127.478,119.772 127.478,120.273 ; 146,65.772 146,66.272 146,67.272 146,67.773 ; 146,118.272 146,118.772 146,119.772 146,120.273 ; 151.46,65.772 151.46,66.272 151.46,67.272 151.46,67.773 ; 151.46,118.272 151.46,118.772 151.46,119.772 151.46,120.273 ; 176,65.772 176,66.272 176,67.272 176,67.773 ; 176,118.272 176,118.772 176,119.772 176,120.273 ; 181.46,65.772 181.46,66.272 181.46,67.272 181.46,67.773 ; 181.46,118.272 181.46,118.772 181.46,119.772 181.46,120.273 ; 200,65.772 200,66.272 200,67.272 200,67.773 ; 200,118.272 200,118.772 200,119.772 200,120.273 ; 205.46,65.772 205.46,66.272 205.46,67.272 205.46,67.773 ; 205.46,118.272 205.46,118.772 205.46,119.772 205.46,120.273 ; 224,65.772 224,66.272 224,67.272 224,67.773 ; 224,118.272 224,118.772 224,119.772 224,120.273 ; 229.46,65.772 229.46,66.272 229.46,67.272 229.46,67.773 ; 229.46,118.272 229.46,118.772 229.46,119.772 229.46,120.273 ; 248,65.772 248,66.272 248,67.272 248,67.773 ; 248,118.272 248,118.772 248,119.772 248,120.273 ; 253.46,65.772 253.46,66.272 253.46,67.272 253.46,67.773 ; 253.46,118.272 253.46,118.772 253.46,119.772 253.46,120.273
  lines w3.5: 219.55,11.55 224.725,16.725 238.475,16.725 243.8,22.05 ; 219.6,10.85 217.075,8.325 222.15,8.325 219.6,10.875 219.6,11.125 ; 249.525,18.025 249.8,18.225 249.8,36.25
  lines w4: 228.875,8.8 240.375,8.8 242.981,11.481 249.525,18.025